# Altium PCB Control_Board_Model_C_Rigid_Flex.PcbDoc (part 4 of 8)
Units mm, origin at the board's own origin, x right, y up, seen from the top; angles counter-clockwise.
Board outline 86.8 x 53.6 mm, 6 copper layers (1-GND, 2-Sig, 3-Pwr, 4-GND, 5-Sig, 6-GND), stack 0.998 mm thick; 418 components, 342 nets, 1601 pads, 45 vias.
Unrouted connection lines stored in the file: 25.
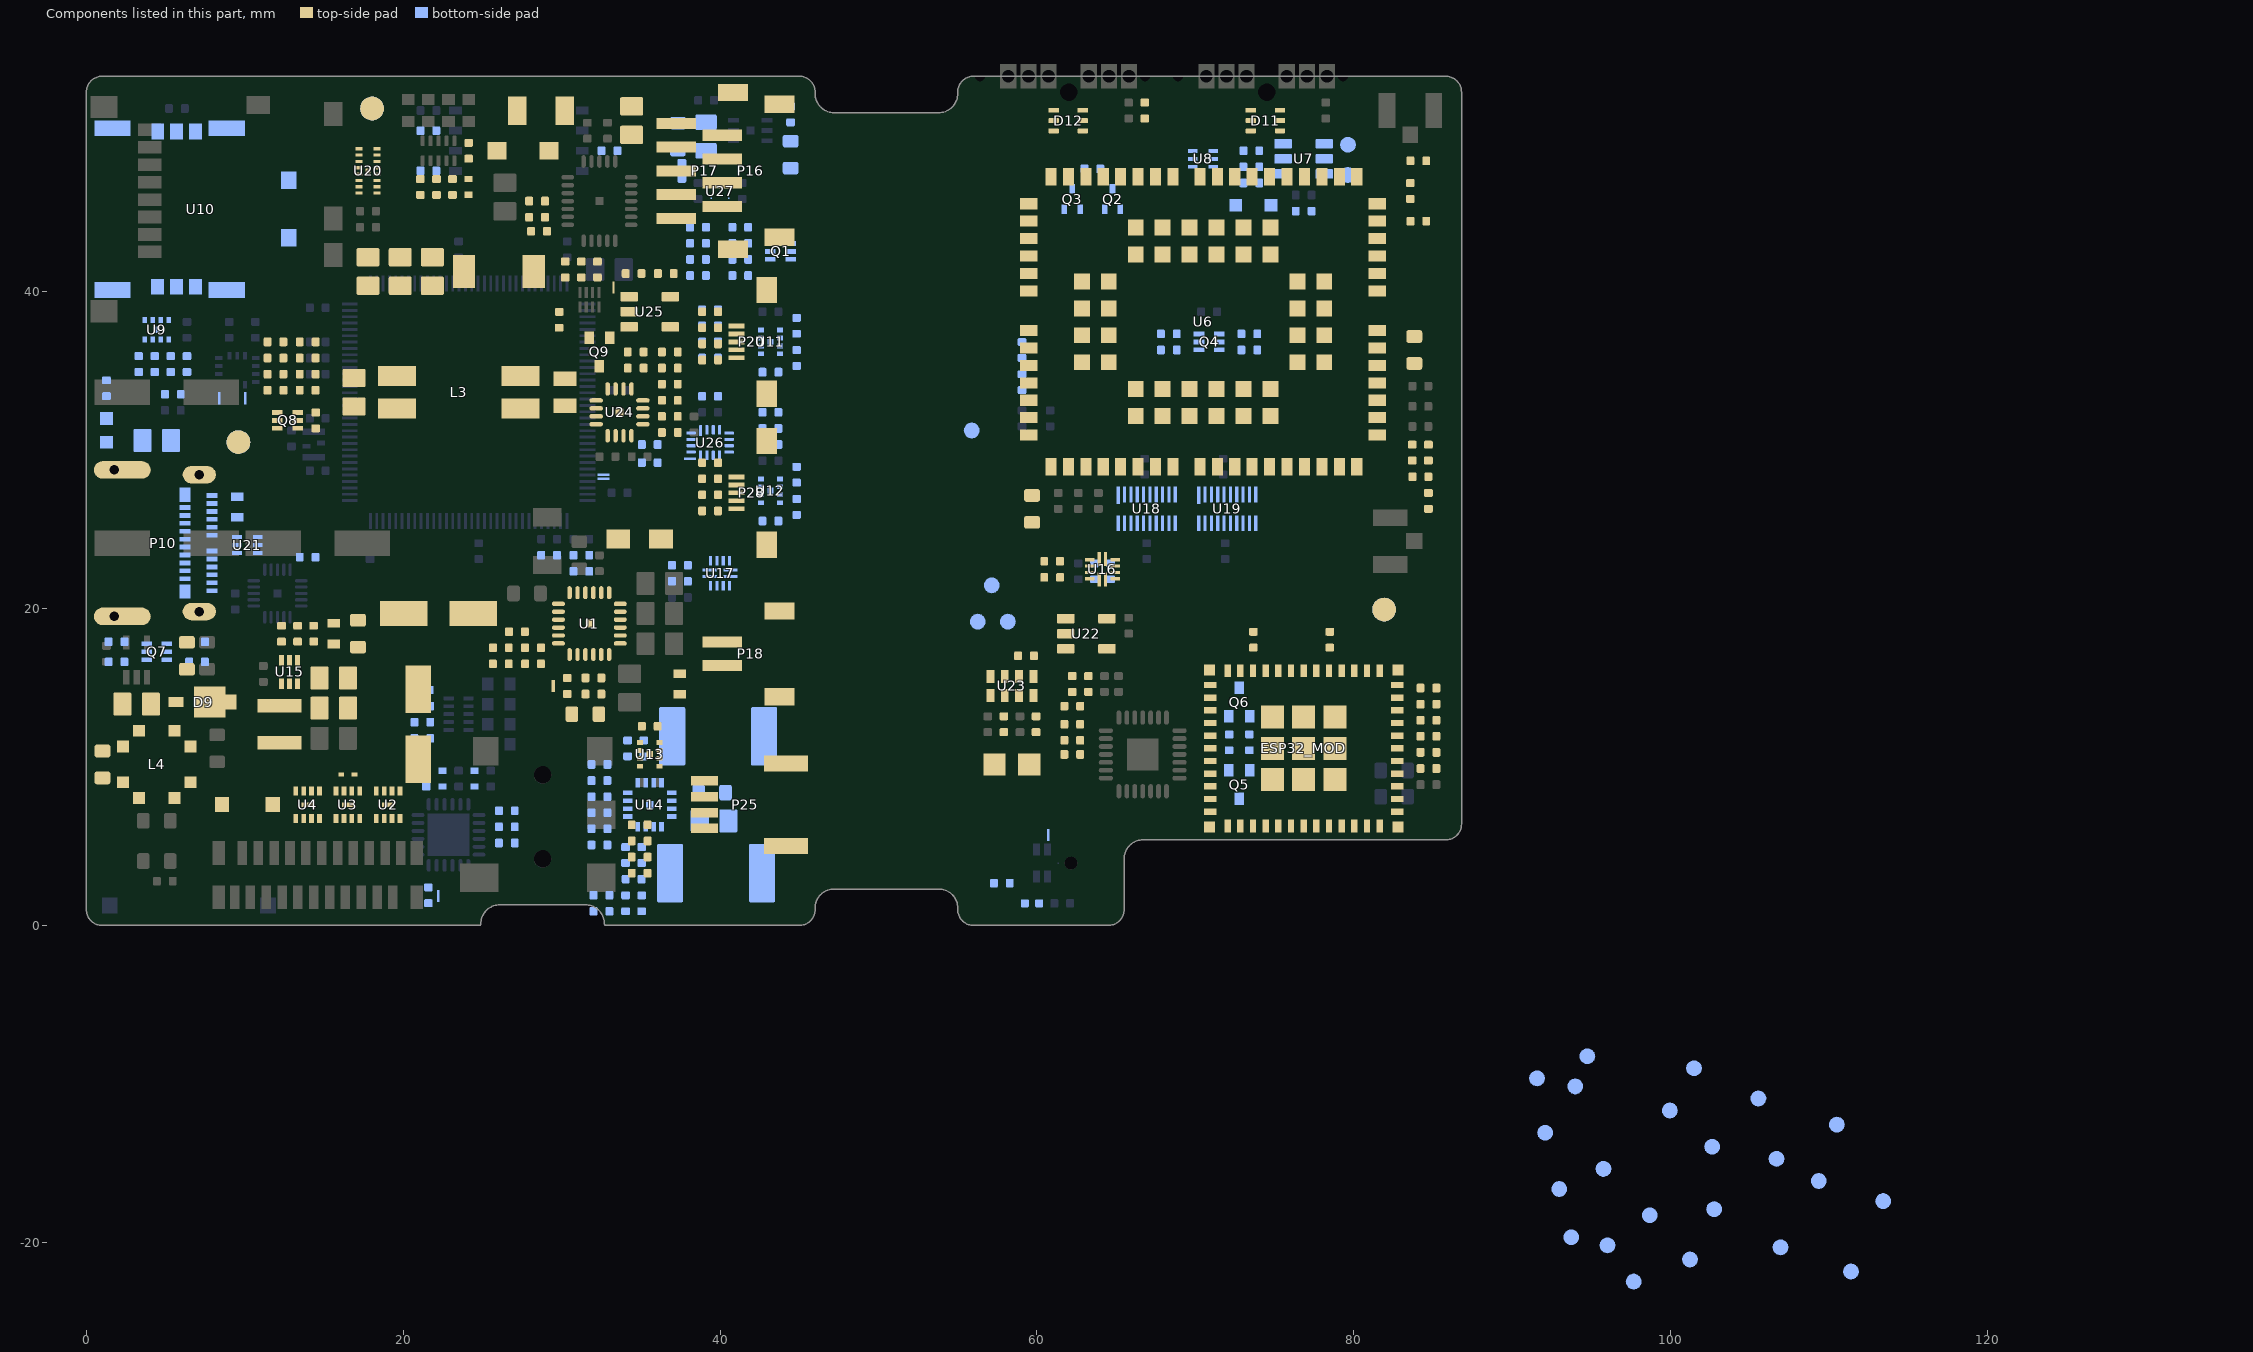
[diagram p7: the components of this part, seen from the top]

## Part data (continued)
C25 C26: "100µF 6.3V Aluminum Electrolytic Capacitors Radial, Can - SMD  2000 Hrs @ 105°C", Capacitance=100uF, Capacitance Tolerance=+/-20%, Case/Package=Radial, Leakage Current=6.3uA, Manufacturer="Wurth Elektronik", Manufacturer Part Number=865080142007, Max Operating Temperature=105°C, Min Operating Temperature=-55°C, Operating Temperature="-55 to +105degC", Package Quantity=1000, Ripple Current=170mA, Supplier Part Number 1=732-8472-1-ND, Tolerance=20%, Voltage Rating=6.3V, ClassName=P109, ComponentLink1Description=Manufacturer, ComponentLink1URL=http://www.we-online.de, ComponentLink2Description=Datasheet, ComponentLink2URL=https://www.we-online.com/catalog/datasheet/865080142007.pdf, ComponentLink3Description=http://www.farnell.com/datasheets/1880090.pdf?src-supplier=Farnell, ComponentLink3URL=http://www.farnell.com/datasheets/1880090.pdf?src-supplier=Farnell, ComponentLink4Description=http://www.farnell.com/datasheets/1880090.pdf?src-supplier=Newark, ComponentLink4URL=http://www.farnell.com/datasheets/1880090.pdf?src-supplier=Newark, ComponentLink5Description=http://katalog.we-online.de/pbs/datasheet/865080142007.pdf?src-supplier=Digi-Key, ComponentLink5URL=http://katalog.we-online.de/pbs/datasheet/865080142007.pdf?src-supplier=Digi-Key, ComponentLink6Description=http://www.farnell.com/datasheets/1880090.pdf?src-supplier=Element14, ComponentLink6URL=http://www.farnell.com/datasheets/1880090.pdf?src-supplier=Element14, ComponentLink7Description=https://katalog.we-online.de/pbs/datasheet/865080142007.pdf?src-supplier=Digi-Key, ComponentLink7URL=https://katalog.we-online.de/pbs/datasheet/865080142007.pdf?src-supplier=Digi-Key, Diameter=5mm, Dissipation Factor=24%, Endurance=2000h, Height=5.5mm, Height - Seated (Max)=0.217inch, Impedance=800mR, Life (Hours)=2000Hour, Mount="Surface Mount", Mounting Technology=SMT, Packaging="Tape and Reel", Polarity=Polar, Pricing 1="1=0.2, 50=0.167, 100=0.145, 250=0.129, 500=0.113 (USD)", Published Date="May 2020", REACH SVHC=Unknown, Ripple Current (AC)=170mA, Stock 1=2227, Supplier 1=Digi-Key, Technical Reference=ASEC055101M6R3DVCTBB000, Voltage Rating (DC)=6.3V
C27 C28 C29 C30 C40 C41 C42: library part "CAP CER NO_BOM 0402", "Placeholder for a 0402 capacitor"
  C27 C28 C29 C30: ClassName=P109
C31 C97: "100pF ±5% 50V Ceramic Capacitor C0G, NP0 0402 (1005 Metric)", Capacitance=100pF, Case/Package=0402, Case Code (Metric)=1005, Dielectric=C0G, Dielectric Material=Ceramic, Insulation Resistance=100GR, Manufacturer=Yageo, Manufacturer Part Number=CC0402JRNPO9BN101, Max Operating Temperature=125°C, Min Operating Temperature=-55°C, Package Quantity=1, Supplier Part Number 1=311-1024-1-ND, Temperature Coefficient=30ppm/°C, Tolerance=5%, Voltage=50V, Case Code (Imperial)=0402, ComponentLink1Description=http://www.farnell.com/datasheets/2213336.pdf?src-supplier=Newark, ComponentLink1URL=http://www.farnell.com/datasheets/2213336.pdf?src-supplier=Newark, ComponentLink2Description=http://www.yageo.com/documents/recent/UPY-GP_NP0_16V-to-50V_16.pdf?src-supplier=Digi-Key, ComponentLink2URL=http://www.yageo.com/documents/recent/UPY-GP_NP0_16V-to-50V_16.pdf?src-supplier=Digi-Key, ComponentLink3Description=http://documents.rs-components.com/techlib://itc_doclist_GB.htm?stockno=6698684&src-supplier=RSComponents, ComponentLink3URL=http://documents.rs-components.com/techlib://itc_doclist_GB.htm?stockno=6698684&src-supplier=RSComponents, ComponentLink4Description=http://www.yageo.com/documents/recent/UPY-GP_NP0_16V-to-50V_8.pdf?src-supplier=Avnet+Europe, ComponentLink4URL=http://www.yageo.com/documents/recent/UPY-GP_NP0_16V-to-50V_8.pdf?src-supplier=Avnet+Europe, ComponentLink5Description=http://www.farnell.com/datasheets/1443161.pdf?src-supplier=Element14, ComponentLink5URL=http://www.farnell.com/datasheets/1443161.pdf?src-supplier=Element14, ComponentLink6Description=http://www.farnell.com/datasheets/2213336.pdf?src-supplier=Element14, ComponentLink6URL=http://www.farnell.com/datasheets/2213336.pdf?src-supplier=Element14, Composition=Ceramic, Depth=0.5mm, Height=0.5mm, Lead Free="Lead Free", Length=1mm, Mount="Surface Mount", Number of Pins=2, Packaging="Tape and Reel", Pricing 1="1=0.1, 10=0.02, 100=0.0089, 500=0.0064, 1000=0.005, 2500=0.0046, 5000=0.0042 (USD)", Radiation Hardening=No, REACH SVHC="No SVHC", Stock 1=4235236, Supplier 1=Digi-Key, Termination=SMD/SMT, Thickness=0.022inch, Voltage Rating=50V, Voltage Rating (DC)=50V, Width=0.5mm
C32 C43 C95 C98: "Cap Cer 10nF 25V X7R 10% 0402", Capacitance=10nF, Case/Package=0402, Case Code (Metric)=1005, Dielectric=X7R, Insulation Resistance=100GR, Manufacturer="Kyocera AVX", Manufacturer Part Number=04023C103KAT2A, Max Operating Temperature=125°C, Min Operating Temperature=-55°C, Package Quantity=1, Supplier Part Number 1=478-1113-1-ND, Tolerance=10%, Voltage=25V, Case Code (Imperial)=0402, ComponentLink1Description=http://www.farnell.com/datasheets/2237835.pdf?src-supplier=Element14, ComponentLink1URL=http://www.farnell.com/datasheets/2237835.pdf?src-supplier=Element14, ComponentLink2Description=http://catalogs.avx.com/SurfaceMount.pdf?src-supplier=Digi-Key, ComponentLink2URL=http://catalogs.avx.com/SurfaceMount.pdf?src-supplier=Digi-Key, ComponentLink3Description=http://www.alliedelec.com/m/d/a24bb5190bea413b2ff164816f55e87c.pdf?src-supplier=Allied+Electronics, ComponentLink3URL=http://www.alliedelec.com/m/d/a24bb5190bea413b2ff164816f55e87c.pdf?src-supplier=Allied+Electronics, ComponentLink4Description=http://uk.rs-online.com/webdocs/13ec/0900766b813ece35.pdf?src-supplier=RSComponents, ComponentLink4URL=http://uk.rs-online.com/webdocs/13ec/0900766b813ece35.pdf?src-supplier=RSComponents, Depth=0.5mm, Dissipation Factor=12.5%, Height=0.56mm, Lead Free="Lead Free", Length=1mm, Packaging="Tape and Reel", Pricing 1="1=0.1, 10=0.034, 50=0.0182, 100=0.0149, 500=0.0107, 1000=0.0084, 2500=0.0076, 5000=0.007 (USD)", Radiation Hardening=No, REACH SVHC="No SVHC", Stock 1=1015537, Supplier 1=Digi-Key, Termination=SMD/SMT, Thickness=0.022inch, Voltage Rating=25V, Voltage Rating (DC)=25V, Width=0.02inch
  C32: ClassName=P109, Mount="Surface Mount"
  C43: Mount="Surface Mount"
  C95 C98: Mount="Surface Mount,PCB"
C37 C38 C39 C45 C86 C87: "1µF ±10% 6.3V Ceramic Capacitor X5R 0402 (1005 Metric)", Capacitance=1uF, Case/Package=0402, Case Code (Metric)=1005, Dielectric=X5R, Dielectric Material=Ceramic, Manufacturer=Yageo, Manufacturer Part Number=CC0402KRX5R5BB105, Max Operating Temperature=85°C, Min Operating Temperature=-55°C, Package Quantity=1, Supplier Part Number 1=311-1438-1-ND, Tolerance=10%, Voltage Rating=6.3V, Case Code (Imperial)=0402, ComponentLink1Description=http://www.farnell.com/datasheets/70765.pdf?src-supplier=Farnell, ComponentLink1URL=http://www.farnell.com/datasheets/70765.pdf?src-supplier=Farnell, ComponentLink2Description=http://www.yageo.com/documents/recent/UPY-GPHC_X5R_4V-to-50V_25.pdf?src-supplier=Digi-Key, ComponentLink2URL=http://www.yageo.com/documents/recent/UPY-GPHC_X5R_4V-to-50V_25.pdf?src-supplier=Digi-Key, ComponentLink3Description=http://www.farnell.com/datasheets/2167237.pdf?src-supplier=Element14, ComponentLink3URL=http://www.farnell.com/datasheets/2167237.pdf?src-supplier=Element14, ComponentLink4Description=http://www.yageo.com/documents/recent/UPY-GPHC_X5R_4V-to-50V_12.pdf?src-supplier=Avnet+Europe, ComponentLink4URL=http://www.yageo.com/documents/recent/UPY-GPHC_X5R_4V-to-50V_12.pdf?src-supplier=Avnet+Europe, ComponentLink5Description=http://www.farnell.com/datasheets/1359354.pdf?src-supplier=Element14, ComponentLink5URL=http://www.farnell.com/datasheets/1359354.pdf?src-supplier=Element14, ComponentLink6Description=http://www.farnell.com/datasheets/70765.pdf?src-supplier=Element14, ComponentLink6URL=http://www.farnell.com/datasheets/70765.pdf?src-supplier=Element14, ComponentLink7Description=http://www.yageo.com/documents/recent/UPY-GPHC_X5R_4V-to-50V_12.pdf?src-supplier=Avnet, ComponentLink7URL=http://www.yageo.com/documents/recent/UPY-GPHC_X5R_4V-to-50V_12.pdf?src-supplier=Avnet, Composition=Ceramic, Depth=0.5mm, Halogen Free="Halogen Free", Height=0.5mm, Lead Free="Lead Free", Length=1mm, Mount="Surface Mount", Number of Pins=2, Packaging="Tape and Reel", Pricing 1="1=0.1, 10=0.05, 50=0.0272, 100=0.0222, 500=0.0158, 1000=0.0124, 2500=0.0113, 5000=0.0104 (USD)", Radiation Hardening=No, REACH SVHC="No SVHC", Stock 1=34926286, Supplier 1=Digi-Key, Termination=SMD/SMT, Thickness=0.022inch, Voltage Rating (DC)=6.3V, Width=0.02inch
C44: "1000pF ±10% 50V Ceramic Capacitor X7R 0402 (1005 Metric)", Capacitance=1nF, Case/Package=0402, Dielectric=X7R, Dielectric Material=Ceramic, Manufacturer=TDK-Lambda, Manufacturer Part Number=C0402C102K5RACTU, Supplier Part Number 1=399-1032-6-ND, Tolerance=10%, Voltage Rating (DC)=50V, ComponentLink1Description=http://www.onlinecomponents.com/productFiles/mf-KEM/kem_c1002_x7r_smd.pdf?src-supplier=Onlinecomponents.com, ComponentLink1URL=http://www.onlinecomponents.com/productFiles/mf-KEM/kem_c1002_x7r_smd.pdf?src-supplier=Onlinecomponents.com, Height=500um, Length=1mm, Mount="Surface Mount", Number of Pins=2, Packaging="Cut Tape", Pricing 1="1=0.1, 10=0.021, 50=0.0116, 100=0.0095, 500=0.0068, 1000=0.0053, 2500=0.0048, 5000=0.0045 (USD)", REACH SVHC="No SVHC", Stock 1=1578852, Supplier 1=Digi-Key, Width=500um
C46: "0.022µF ±10% 25V Ceramic Capacitor X7R 0402 (1005 Metric)", Capacitance=22nF, Case/Package=0402, Case Code (Metric)=1005, Dielectric=X7R, Manufacturer=TDK, Manufacturer Part Number=CGA2B2X7R1E223K050BA, Max Operating Temperature=125°C, Min Operating Temperature=-55°C, Package Quantity=1, Ratings=AEC-Q200, Supplier Part Number 1=445-5609-1-ND, Tolerance=10%, Voltage Rating=25V, Case Code (Imperial)=0402, ComponentLink1Description=http://www.mouser.com/ds/2/400/lcc_automotive_general_en-843974.pdf?src-supplier=Mouser, ComponentLink1URL=http://www.mouser.com/ds/2/400/lcc_automotive_general_en-843974.pdf?src-supplier=Mouser, Composition=Ceramic, Depth=0.5mm, Height=0.5mm, Length=1mm, Mount="Surface Mount", Packaging="Tape and Reel", Pricing 1="1=0.1, 10=0.057, 50=0.0312, 100=0.0255, 500=0.0182, 1000=0.0143, 2500=0.013, 5000=0.012 (USD)", REACH SVHC="No SVHC", Stock 1=330320, Supplier 1=Digi-Key, Termination=SMD/SMT, Thickness=0.022inch, Voltage Rating (DC)=25V, Weight=2.3E-05oz, Width=0.5mm
C47 C73 C77 C78 C79 C80 C89: "22µF ±20% 25V Ceramic Capacitor X5R 0805 (2012 Metric)", Capacitance=22uF, Case/Package=0805, Case Code (Metric)=2012, Dielectric=X5R, Manufacturer=Yageo, Manufacturer Part Number=CC0805MKX5R8BB226, Max Operating Temperature=85°C, Min Operating Temperature=-55°C, Package Quantity=3000, Supplier Part Number 1=311-1903-1-ND, Tolerance=20%, Voltage Rating=25V, Case Code (Imperial)=0805, ComponentLink1Description=http://www.yageo.com/documents/recent/UPY-GPHC_X5R_4V-to-50V_25.pdf?src-supplier=Digi-Key, ComponentLink1URL=http://www.yageo.com/documents/recent/UPY-GPHC_X5R_4V-to-50V_25.pdf?src-supplier=Digi-Key, ComponentLink2Description=http://www.mouser.com/ds/2/447/Yageo_UPY-GP_NP0_16V-to-50V_9-358835.pdf?src-supplier=Mouser, ComponentLink2URL=http://www.mouser.com/ds/2/447/Yageo_UPY-GP_NP0_16V-to-50V_9-358835.pdf?src-supplier=Mouser, Halogen Free="Halogen Free", Height=1.25mm, Lead Free="Lead Free", Length=0.079inch, Mount="Surface Mount", Packaging="Tape and Reel", Pricing 1="1=0.5, 10=0.353, 50=0.267, 100=0.2325, 500=0.1722, 1000=0.1464 (USD)", Stock 1=1060, Supplier 1=Digi-Key, Termination=SMD/SMT, Thickness=0.057inch, Voltage Rating (DC)=25V, Weight=0.000194oz, Width=0.049inch
C48: "2.2µF ±10% 16V Ceramic Capacitor X5R 0603 (1608 Metric)", Capacitance=2.2uF, Case/Package=0603, Case Code (Metric)=1608, Dielectric=X5R, Manufacturer=Yageo, Manufacturer Part Number=CC0603KRX5R7BB225, Max Operating Temperature=85°C, Min Operating Temperature=-55°C, Supplier Part Number 1=311-1784-1-ND, Tolerance=10%, Voltage Rating=16V, Case Code (Imperial)=0603, ComponentLink1Description=http://www.farnell.com/datasheets/2167237.pdf?src-supplier=Element14, ComponentLink1URL=http://www.farnell.com/datasheets/2167237.pdf?src-supplier=Element14, Composition=Ceramic, Depth=0.8mm, Halogen Free="Halogen Free", Height=0.8mm, Lead Free="Lead Free", Length=1.6mm, Mount="Surface Mount", Packaging="Tape and Reel", Pricing 1="1=0.19, 10=0.132, 100=0.0667, 500=0.0456, 1000=0.0404 (USD)", Radiation Hardening=No, REACH SVHC=Unknown, Stock 1=126369, Supplier 1=Digi-Key, Termination=SMD/SMT, Thickness=0.035inch, Voltage Rating (DC)=16V, Width=0.031inch
C51 C52: "22µF ±20% 10V Ceramic Capacitor X5R 0805 (2012 Metric)", Capacitance=22uF, Case/Package=0805, Case Code (Metric)=2012, Dielectric=X5R, Manufacturer="Taiyo Yuden", Manufacturer Part Number=LMK212BJ226MG-T, Max Operating Temperature=85°C, Min Operating Temperature=-55°C, Package Quantity=1, Supplier Part Number 1=587-1958-1-ND, Tolerance=20%, Voltage Rating=10V, Case Code (Imperial)=0805, ComponentLink1Description=https://www.yuden.co.jp/productdata/catalog/mlcc_all_e.pdf?src-supplier=Onlinecomponents.com, ComponentLink1URL=https://www.yuden.co.jp/productdata/catalog/mlcc_all_e.pdf?src-supplier=Onlinecomponents.com, ComponentLink2Description=https://www.yuden.co.jp/productdata/catalog/mlcc01_e.pdf?src-supplier=Digi-Key, ComponentLink2URL=https://www.yuden.co.jp/productdata/catalog/mlcc01_e.pdf?src-supplier=Digi-Key, ComponentLink3Description=https://www.yuden.co.jp/productdata/catalog/mlcc_all_e.pdf?src-supplier=Mouser, ComponentLink3URL=https://www.yuden.co.jp/productdata/catalog/mlcc_all_e.pdf?src-supplier=Mouser, ComponentLink4Description=http://www.farnell.com/datasheets/1910934.pdf?src-supplier=Element14, ComponentLink4URL=http://www.farnell.com/datasheets/1910934.pdf?src-supplier=Element14, ComponentLink5Description=https://www.yuden.co.jp/productdata/catalog/mlcc_all_e.pdf?src-supplier=Avnet, ComponentLink5URL=https://www.yuden.co.jp/productdata/catalog/mlcc_all_e.pdf?src-supplier=Avnet, Composition=Ceramic, Depth=1.25mm, Height=1.25mm, Length=2mm, Mount="Surface Mount", Number of Pins=2, Packaging="Tape and Reel", Pricing 1="1=0.45, 10=0.312, 100=0.1875, 500=0.1406, 1000=0.1187 (USD)", Radiation Hardening=No, REACH SVHC=Unknown, Stock 1=1006805, Supplier 1=Digi-Key, Termination=SMD/SMT, Thickness=0.053inch, Voltage Rating (DC)=10V, Width=0.049inch
C61 C63: "220pF ±10% 50V Ceramic Capacitor X7R 0402 (1005 Metric)", Capacitance=220pF, Case/Package=0402, Case Code (Metric)=1005, Dielectric=X7R, Dielectric Material=Ceramic, Insulation Resistance=100GR, Manufacturer=Yageo, Manufacturer Part Number=CC0402KRX7R9BB221, Max Operating Temperature=125°C, Min Operating Temperature=-55°C, Package Quantity=1, Supplier Part Number 1=311-1035-1-ND, Tolerance=10%, Voltage Rating=50V, Case Code (Imperial)=0402, ClassName=TCPP, ComponentLink1Description=http://www.yageo.com/documents/recent/UPY-GPHC_X7R_6.3V-to-50V_18.pdf?src-supplier=Digi-Key, ComponentLink1URL=http://www.yageo.com/documents/recent/UPY-GPHC_X7R_6.3V-to-50V_18.pdf?src-supplier=Digi-Key, ComponentLink2Description=http://www.farnell.com/datasheets/2167236.pdf?src-supplier=Farnell, ComponentLink2URL=http://www.farnell.com/datasheets/2167236.pdf?src-supplier=Farnell, ComponentLink3Description=http://www.yageo.com/documents/recent/UPY-GPHC_X7R_6.3V-to-50V_8.pdf?src-supplier=Avnet, ComponentLink3URL=http://www.yageo.com/documents/recent/UPY-GPHC_X7R_6.3V-to-50V_8.pdf?src-supplier=Avnet, ComponentLink4Description=http://www.farnell.com/datasheets/1489800.pdf?src-supplier=Element14, ComponentLink4URL=http://www.farnell.com/datasheets/1489800.pdf?src-supplier=Element14, ComponentLink5Description=http://www.mouser.com/ds/2/447/Yageo_UPY-GP_NP0_16V-to-50V_9-358835.pdf?src-supplier=Mouser, ComponentLink5URL=http://www.mouser.com/ds/2/447/Yageo_UPY-GP_NP0_16V-to-50V_9-358835.pdf?src-supplier=Mouser, ComponentLink6Description=https://www.verical.com/server-webapp/html/getDatasheet?partID=403476&src-supplier=Verical, ComponentLink6URL=https://www.verical.com/server-webapp/html/getDatasheet?partID=403476&src-supplier=Verical, ComponentLink7Description=http://www.yageo.com/documents/recent/UPY-GPHC_X7R_6.3V-to-50V_8.pdf?src-supplier=Avnet+Europe, ComponentLink7URL=http://www.yageo.com/documents/recent/UPY-GPHC_X7R_6.3V-to-50V_8.pdf?src-supplier=Avnet+Europe, Composition=Ceramic, Depth=0.5mm, Halogen Free="Halogen Free", Height=0.5mm, Lead Free="Lead Free", Length=1mm, Mount="Surface Mount", Number of Pins=2, Packaging="Tape and Reel", Pricing 1="1=0.1, 10=0.026, 50=0.014, 100=0.0114, 500=0.0081, 1000=0.0064, 2500=0.0058, 5000=0.0053 (USD)", Radiation Hardening=No, REACH SVHC="No SVHC", Stock 1=91221, Supplier 1=Digi-Key, Termination=SMD/SMT, Thickness=0.022inch, Voltage Rating (DC)=50V, Weight=2.3E-05oz, Width=0.02inch
C62: Capacitance=4.7uF, Case/Package=0805, Case Code (Metric)=2012, Dielectric=X7R, Dielectric Material=Ceramic, Manufacturer=TDK, Manufacturer Part Number=C2012X7R1V475K125AC, Max Operating Temperature=125°C, Min Operating Temperature=-55°C, Package Quantity=2000, Supplier Part Number 1=445-7555-1-ND, Tolerance=10%, Voltage Rating=35V, Case Code (Imperial)=0805, ComponentLink1Description=http://www.farnell.com/datasheets/2792994.pdf?src-supplier=Element14, ComponentLink1URL=http://www.farnell.com/datasheets/2792994.pdf?src-supplier=Element14, ComponentLink2Description=https://product.tdk.com/info/en/catalog/datasheets/mlcc_commercial_general_en.pdf?src-supplier=Digi-Key, ComponentLink2URL=https://product.tdk.com/info/en/catalog/datasheets/mlcc_commercial_general_en.pdf?src-supplier=Digi-Key, ComponentLink3Description=https://product.tdk.com/info/en/catalog/spec/mlccspec_commercial_general_midvoltage_en.pdf?src-supplier=Digi-Key, ComponentLink3URL=https://product.tdk.com/info/en/catalog/spec/mlccspec_commercial_general_midvoltage_en.pdf?src-supplier=Digi-Key, Depth=1.25mm, Height=1.25mm, Lead Free="Lead Free", Length=2mm, Mount="Surface Mount", Packaging="Tape and Reel", Pricing 1="1=0.73, 10=0.519, 50=0.3752, 100=0.3416, 500=0.253, 1000=0.2151 (USD)", Radiation Hardening=No, REACH SVHC="No SVHC", Stock 1=109602, Supplier 1=Digi-Key, Termination=SMD/SMT, Thickness=0.057inch, Voltage Rating (DC)=35V, Weight=0.000194oz, Width=0.049inch
C70: "11mF (EDLC) Supercapacitor 3.3V 1210 (3225 Metric)", Capacitance=11mF, Case/Package=1210, Case Code (Metric)=3225, ESR (Equivalent Series Resistance)=160R, Manufacturer=Seiko, Manufacturer Part Number=CPH3225A, Max Operating Temperature=60°C, Min Operating Temperature=-20°C, Package Quantity=2000, Supplier Part Number 1=728-1127-1-ND, Voltage Rating=3.3V, Case Code (Imperial)=1210, ComponentLink1Description=http://www.sii.co.jp/en/me/datasheets/chip-capacitor/cph3225a/?src-supplier=Mouser, ComponentLink1URL=http://www.sii.co.jp/en/me/datasheets/chip-capacitor/cph3225a/?src-supplier=Mouser, ComponentLink2Description=http://www.sii-components.com/document/en/battery/Chip_Capacitor_E.pdf?src-supplier=Avnet+Asia, ComponentLink2URL=http://www.sii-components.com/document/en/battery/Chip_Capacitor_E.pdf?src-supplier=Avnet+Asia, ComponentLink3Description=https://media.digikey.com/pdf/Data%20Sheets/Seiko%20Instruments%20PDFs/CPH3225A_CP3225A.pdf?src-supplier=Digi-Key, ComponentLink3URL=https://media.digikey.com/pdf/Data%20Sheets/Seiko%20Instruments%20PDFs/CPH3225A_CP3225A.pdf?src-supplier=Digi-Key, Height=0.9mm, Height - Seated (Max)=0.035inch, Length=3.2mm, Mount="Surface Mount", Packaging="Tape and Reel", Pricing 1="1=2.02, 10=1.634, 50=1.4256, 100=1.2474, 500=0.9504, 1000=0.8316, 2500=0.8019, 5000=0.7722 (USD)", Stock 1=48098, Supplier 1=Digi-Key, Termination=SMD/SMT, Voltage Rating (DC)=3.3V, Width=2.5mm
C75: "1800pF ±5% 50V Ceramic Capacitor X7R 0402 (1005 Metric)", Capacitance=1.8nF, Case/Package=0402, Case Code (Metric)=1005, Dielectric=X7R, Dielectric Material=Ceramic, Manufacturer=KEMET, Manufacturer Part Number=C0402C182J5RACTU, Max Operating Temperature=125°C, Min Operating Temperature=-55°C, Package Quantity=1, Supplier Part Number 1=399-8953-1-ND, Tolerance=5%, Voltage Rating=50V, Case Code (Imperial)=0402, ComponentLink1Description=http://www.mouser.com/ds/2/212/KEM_C1002_X7R_SMD-1102033.pdf?src-supplier=Mouser, ComponentLink1URL=http://www.mouser.com/ds/2/212/KEM_C1002_X7R_SMD-1102033.pdf?src-supplier=Mouser, Depth=0.5mm, Dissipation Factor=2.5%, Height=0.5mm, Lead Pitch=0.3mm, Length=1mm, Mount="Surface Mount", Packaging="Tape and Reel", Pricing 1="1=0.46, 10=0.322, 50=0.2438, 100=0.2124, 500=0.1573, 1000=0.1337, 2500=0.1258, 5000=0.118 (USD)", Radiation Hardening=No, REACH SVHC="No SVHC", Stock 1=45958, Supplier 1=Digi-Key, Termination=SMD/SMT, Thickness=0.022inch, Voltage Rating (DC)=50V, Width=0.02inch
C76 C81 C100 C117 C119 C129 C131 C132 C147: "1µF ±10% 16V Ceramic Capacitor X5R 0402 (1005 Metric)", Capacitance=1uF, Case/Package=0402, Case Code (Metric)=1005, Dielectric=X5R, Manufacturer=Yageo, Manufacturer Part Number=CC0402KRX5R7BB105, Max Operating Temperature=85°C, Min Operating Temperature=-55°C, Supplier Part Number 1=311-1691-1-ND, Tolerance=10%, Voltage Rating=16V, Case Code (Imperial)=0402, ComponentLink1Description=http://www.yageo.com/documents/recent/UPY-GPHC_X5R_4V-to-50V_12.pdf?src-supplier=Avnet+Europe, ComponentLink1URL=http://www.yageo.com/documents/recent/UPY-GPHC_X5R_4V-to-50V_12.pdf?src-supplier=Avnet+Europe, Composition=Ceramic, Depth=0.5mm, Halogen Free="Halogen Free", Height=0.5mm, Lead Free="Lead Free", Length=1mm, Mount="Surface Mount", Packaging="Tape and Reel", Pricing 1="1=0.4, 10=0.278, 100=0.167, 500=0.1253, 1000=0.1058, 2500=0.1002, 5000=0.0947 (USD)", Radiation Hardening=No, Stock 1=1114963, Supplier 1=Digi-Key, Termination=SMD/SMT, Thickness=0.022inch, Voltage Rating (DC)=16V, Weight=2.3E-05oz, Width=0.02inch
C91 C92: library part "CAP CER 0.1UF 50V X7R 0402", "0.1µF ±10% 50V Ceramic Capacitor X7R 0402 (1005 Metric)", Capacitance=100nF, Case/Package=0402, Case Code (Metric)=1005, Dielectric=X7R, Manufacturer=TDK, Max Operating Temperature=125°C, Min Operating Temperature=-55°C, Package Quantity=1, Ratings=AEC-Q200, Supplier Part Number 1=445-6899-1-ND, Tolerance=10%, Voltage=50V, Case Code (Imperial)=0402, ComponentLink1Description=http://product.tdk.com/capacitor/mlcc/en/documents/mlccspec_automotive_general_midvoltage_en.pdf?src-supplier=Future+Electronics, ComponentLink1URL=http://product.tdk.com/capacitor/mlcc/en/documents/mlccspec_automotive_general_midvoltage_en.pdf?src-supplier=Future+Electronics, ComponentLink2Description=http://www.farnell.com/datasheets/1807242.pdf?src-supplier=Element14, ComponentLink2URL=http://www.farnell.com/datasheets/1807242.pdf?src-supplier=Element14, ComponentLink3Description=http://www.mouser.com/ds/2/400/lcc_automotive_general_en-843974.pdf?src-supplier=Mouser, ComponentLink3URL=http://www.mouser.com/ds/2/400/lcc_automotive_general_en-843974.pdf?src-supplier=Mouser, ComponentLink4Description=http://www.farnell.com/datasheets/1936565.pdf?src-supplier=Element14, ComponentLink4URL=http://www.farnell.com/datasheets/1936565.pdf?src-supplier=Element14, ComponentLink5Description=http://www.farnell.com/datasheets/1735392.pdf?src-supplier=Element14, ComponentLink5URL=http://www.farnell.com/datasheets/1735392.pdf?src-supplier=Element14, Composition=Ceramic, Depth=0.5mm, Height=0.5mm, Lead Free="Lead Free", Length=1mm, Manufacturer Part Number=CGA2B3X7R1H104K050BB, Mount="Surface Mount", Packaging="Tape and Reel", Pricing 1="1=0.17, 10=0.118, 50=0.0668, 100=0.0553, 500=0.0388, 1000=0.0321, 2500=0.0299, 5000=0.0273 (USD)", REACH SVHC="No SVHC", Stock 1=2925303, Supplier 1=Digi-Key, Termination=SMD/SMT, Thickness=0.022inch, Voltage Rating=50V, Voltage Rating (DC)=50V, Weight=2.3E-05oz, Width=0.02inch
C121 C123: "2.2µF ±10% 35V Ceramic Capacitor X5R 0603 (1608 Metric)", Capacitance=2.2uF, Case/Package=0603, Case Code (Metric)=1608, Dielectric=X5R, Manufacturer=Murata, Manufacturer Part Number=GRM188R6YA225KA12D, Max Operating Temperature=85°C, Min Operating Temperature=-55°C, Package Quantity=4000, Supplier Part Number 1=490-7204-1-ND, Tolerance=10%, Voltage=35V, Case Code (Imperial)=0603, ComponentLink1Description=https://www.murata.com/~/media/webrenewal/support/library/catalog/products/capacitor/mlcc/c02e.ashx?la=en-us&src-supplier=Digi-Key, ComponentLink1URL=https://www.murata.com/~/media/webrenewal/support/library/catalog/products/capacitor/mlcc/c02e.ashx?la=en-us&src-supplier=Digi-Key, Depth=0.8mm, Height=0.8mm, Lead Free="Lead Free", Length=1.6mm, Material=Ceramic, Mount="Surface Mount", Packaging="Tape and Reel", Pricing 1="1=0.21, 10=0.141, 100=0.0717, 500=0.049, 1000=0.0434 (USD)", REACH SVHC="No SVHC", Stock 1=323373, Supplier 1=Digi-Key, Termination=SMD/SMT, Thickness=0.035inch, Voltage Rating=35V, Voltage Rating (DC)=35V, Weight=0.000222oz, Width=0.8mm
C126 C142: "100pF ±5% 50V Ceramic Capacitor C0G, NP0 0402 (1005 Metric)", Capacitance=100pF, Case/Package=0402, Case Code (Metric)=1005, Dielectric=C0G, Dielectric Material=Ceramic, Insulation Resistance=100GR, Manufacturer=Yageo, Manufacturer Part Number=CC0402JRNPO9BN101, Max Operating Temperature=125°C, Min Operating Temperature=-55°C, Package Quantity=1, Supplier Part Number 1=311-1024-6-ND, Temperature Coefficient=30ppm/°C, Tolerance=5%, Voltage=50V, Case Code (Imperial)=0402, ComponentLink1Description=http://www.farnell.com/datasheets/2213336.pdf?src-supplier=Newark, ComponentLink1URL=http://www.farnell.com/datasheets/2213336.pdf?src-supplier=Newark, ComponentLink2Description=http://www.yageo.com/documents/recent/UPY-GP_NP0_16V-to-50V_16.pdf?src-supplier=Digi-Key, ComponentLink2URL=http://www.yageo.com/documents/recent/UPY-GP_NP0_16V-to-50V_16.pdf?src-supplier=Digi-Key, ComponentLink3Description=http://documents.rs-components.com/techlib://itc_doclist_GB.htm?stockno=6698684&src-supplier=RSComponents, ComponentLink3URL=http://documents.rs-components.com/techlib://itc_doclist_GB.htm?stockno=6698684&src-supplier=RSComponents, ComponentLink4Description=http://www.yageo.com/documents/recent/UPY-GP_NP0_16V-to-50V_8.pdf?src-supplier=Avnet+Europe, ComponentLink4URL=http://www.yageo.com/documents/recent/UPY-GP_NP0_16V-to-50V_8.pdf?src-supplier=Avnet+Europe, ComponentLink5Description=http://www.farnell.com/datasheets/1443161.pdf?src-supplier=Element14, ComponentLink5URL=http://www.farnell.com/datasheets/1443161.pdf?src-supplier=Element14, ComponentLink6Description=http://www.farnell.com/datasheets/2213336.pdf?src-supplier=Element14, ComponentLink6URL=http://www.farnell.com/datasheets/2213336.pdf?src-supplier=Element14, Composition=Ceramic, Depth=0.5mm, Height=0.5mm, Lead Free="Lead Free", Length=1mm, Mount="Surface Mount", Number of Pins=2, Packaging="Tape and Reel", Pricing 1="1=0.1, 10=0.02, 100=0.0089, 500=0.0064, 1000=0.005, 2500=0.0046, 5000=0.0042 (USD)", Radiation Hardening=No, REACH SVHC="No SVHC", Stock 1=3017640, Supplier 1=Digi-Key, Termination=SMD/SMT, Thickness=0.022inch, Voltage Rating=50V, Voltage Rating (DC)=50V, Width=0.5mm
C136: "10µF ±10% 16V Ceramic Capacitor X7R 0805 (2012 Metric)", Capacitance=10uF, Case/Package=0805, Case Code (Metric)=2012, Dielectric=X7R, Manufacturer=Samsung, Manufacturer Part Number=CL21B106KOQNNNG, Max Operating Temperature=125°C, Min Operating Temperature=-55°C, Package Quantity=3000, Supplier Part Number 1=1276-6472-1-ND, Tolerance=10%, Voltage Rating=16V, Case Code (Imperial)=0805, ComponentLink1Description=http://www.samsungsem.com/kr/support/product-search/mlcc/CL21B106KOQNNNG.jsp?src-supplier=Digi-Key, ComponentLink1URL=http://www.samsungsem.com/kr/support/product-search/mlcc/CL21B106KOQNNNG.jsp?src-supplier=Digi-Key, ComponentLink2Description=https://produktinfo.conrad.com/datenblaetter/450000-474999/454918-da-01-en-VS_KONDENSATOR_0805.pdf?src-supplier=Conrad, ComponentLink2URL=https://produktinfo.conrad.com/datenblaetter/450000-474999/454918-da-01-en-VS_KONDENSATOR_0805.pdf?src-supplier=Conrad, Depth=1.25mm, Lead Free="Lead Free", Length=0.079inch, Material=Ceramic, Mount="Surface Mount", Packaging="Tape and Reel", Pricing 1="1=0.3, 10=0.207, 100=0.1173, 500=0.0828, 1000=0.0725 (USD)", Stock 1=251380, Supplier 1=Digi-Key, Thickness=0.055inch, Width=0.049inch
D1: library part "LED RED CLEAR 0603 SMD", "Red 631nm LED Indication - Discrete 2V 0603 (1608 Metric)", Case/Package=0603, Case Code (Metric)=1608, Color=Red, Forward Current=30mA, Forward Voltage=2V, Lens Color=Colorless, Manufacturer="Vishay Lite-On", Manufacturer Part Number=LTST-C191KRKT, Max Operating Temperature=85°C, Min Operating Temperature=-55°C, Package Quantity=1, Power Dissipation=75mW, Reverse Voltage=5V, Supplier Part Number 1=160-1447-1-ND, Test Current=20mA, Case Code (Imperial)=0603, ComponentLink1Description=http://optoelectronics.liteon.com/upload/download/DS22-2000-223/LTST-C191KRKT.PDF?src-supplier=Digi-Key, ComponentLink1URL=http://optoelectronics.liteon.com/upload/download/DS22-2000-223/LTST-C191KRKT.PDF?src-supplier=Digi-Key, ComponentLink2Description=http://www1.futureelectronics.com/doc/LITE-ON/LTST-C191KRKT.pdf?src-supplier=Future+Electronics, ComponentLink2URL=http://www1.futureelectronics.com/doc/LITE-ON/LTST-C191KRKT.pdf?src-supplier=Future+Electronics, ComponentLink3Description=https://www.verical.com/server-webapp/html/getDatasheet?partID=141922&src-supplier=Verical, ComponentLink3URL=https://www.verical.com/server-webapp/html/getDatasheet?partID=141922&src-supplier=Verical, ComponentLink4Description=http://www.mouser.com/ds/2/239/LTST-C191KRKT-1140668.pdf?src-supplier=Mouser, ComponentLink4URL=http://www.mouser.com/ds/2/239/LTST-C191KRKT-1140668.pdf?src-supplier=Mouser, Depth=0.8mm, Dominant Wavelength=631nm, Height=0.55mm, Illumination Color=Red, Lead Free="Lead Free", Length=1.6mm, Lens Style=Clear,Diffused,Colorless,Rectangular, Lens Transparency=Clear, Luminous Intensity=54mcd, Mount="Surface Mount", Number of Elements=1, Number of LEDs=1, Number of Pins=2, Packaging="Tape and Reel", Power Rating=75mW, Pricing 1="1=0.26, 10=0.192, 100=0.0909, 500=0.0606, 1000=0.0475, 2500=0.0465 (USD)", Radiation Hardening=No, Stock 1=230321, Supplier 1=Digi-Key, Viewing Angle=130°, Voltage=2V, Wavelength=639nm, Width=0.8mm
D2 D5: library part "TVS DIODE ESDA7P120-1U1M 5.5V 11.5V 1610", "11.5V Clamp 120A (8/20µs) Ipp Tvs Diode Surface Mount 1610", Case/Package=0603, Case Code (Metric)=1610, Clamping Voltage=11.5V, Manufacturer=STMicroelectronics, Max Operating Temperature=150°C, Min Breakdown Voltage=6.4V, Min Operating Temperature=-55°C, Peak Pulse Current=120A, Peak Pulse Power=1.4kW, Power Line Protection=No, Reverse Standoff Voltage=5.5V, Supplier Part Number 1=497-17159-1-ND, Case Code (Imperial)=0603, ComponentLink1Description=http://www.st.com/content/ccc/resource/technical/document/datasheet/group3/5e/7c/5d/76/3f/de/45/35/DM00359316/files/DM00359316.pdf/jcr:content/translations/en.DM00359316.pdf?src-supplier=Digi-Key, ComponentLink1URL=http://www.st.com/content/ccc/resource/technical/document/datasheet/group3/5e/7c/5d/76/3f/de/45/35/DM00359316/files/DM00359316.pdf/jcr:content/translations/en.DM00359316.pdf?src-supplier=Digi-Key, ComponentLink2Description=http://www.farnell.com/datasheets/2815837.pdf?src-supplier=Newark, ComponentLink2URL=http://www.farnell.com/datasheets/2815837.pdf?src-supplier=Newark, ComponentLink3Description=http://www.farnell.com/datasheets/2815837.pdf?src-supplier=Farnell, ComponentLink3URL=http://www.farnell.com/datasheets/2815837.pdf?src-supplier=Farnell, ComponentLink4Description=http://www.farnell.com/datasheets/2815837.pdf?src-supplier=Element14, ComponentLink4URL=http://www.farnell.com/datasheets/2815837.pdf?src-supplier=Element14, Composition=Zener, Manufacturer Part Number=ESDA7P120-1U1M, Mount="Surface Mount", Number of Unidirectional Channels=1, Packaging="Cut Tape", Pricing 1="1=0.35, 10=0.287, 25=0.2624, 100=0.1647, 250=0.1629, 500=0.1525, 1000=0.1037, 2500=0.0994 (USD)", Stock 1=15775, Supplier 1=Digi-Key
  D5: ClassName=P109
D3: library part "DIODE SCHOTTKY 30V 70MA SOD923", "Diode Schottky 30V 70mA (DC) Surface Mount SOD-923", Average Rectified Current=70mA, Case/Package=SOD-923-2, Forward Voltage=350mV, Manufacturer="ON Semiconductor", Max Forward Surge Current (Ifsm)=500mA, Max Operating Temperature=125°C, Max Power Dissipation=100mW, Max Repetitive Reverse Voltage (Vrrm)=30V, Max Reverse Leakage Current=500nA, Min Operating Temperature=-55°C, Package Quantity=1, Supplier Part Number 1=NSR0140P2T5GOSCT-ND, ComponentLink1Description=http://www.onsemi.com/pub_link/Collateral/NSR0140P2-D.PDF?src-supplier=Future+Electronics, ComponentLink1URL=http://www.onsemi.com/pub_link/Collateral/NSR0140P2-D.PDF?src-supplier=Future+Electronics, ComponentLink2Description=http://www.farnell.com/datasheets/2353885.pdf?src-supplier=Newark, ComponentLink2URL=http://www.farnell.com/datasheets/2353885.pdf?src-supplier=Newark, ComponentLink3Description=http://www.farnell.com/datasheets/86281.pdf?src-supplier=Element14, ComponentLink3URL=http://www.farnell.com/datasheets/86281.pdf?src-supplier=Element14, ComponentLink4Description=http://www.onsemi.com/pub/Collateral/NSR0140P2-D.PDF?src-supplier=Avnet, ComponentLink4URL=http://www.onsemi.com/pub/Collateral/NSR0140P2-D.PDF?src-supplier=Avnet, ComponentLink5Description=http://www.onsemi.com/pub/Collateral/NSR0140P2-D.PDF?src-supplier=Digi-Key, ComponentLink5URL=http://www.onsemi.com/pub/Collateral/NSR0140P2-D.PDF?src-supplier=Digi-Key, ComponentLink6Description=http://www.mouser.com/ds/2/308/NSR0140P2-D-115172.pdf?src-supplier=Mouser, ComponentLink6URL=http://www.mouser.com/ds/2/308/NSR0140P2-D-115172.pdf?src-supplier=Mouser, Contact Plating=Tin,Matte, Element Configuration=Single, Forward Current=70mA, Height=0.43mm, Lead Free="Lead Free", Length=0.85mm, Manufacturer Part Number=NSR0140P2T5G, Max Reverse Voltage (DC)=30V, Max Surge Current=500mA, Mount="Surface Mount", Number of Pins=2, Packaging="Tape and Reel", Peak Non-Repetitive Surge Current=500mA, Peak Reverse Current=500nA, Power Dissipation=100mW, Pricing 1="1=0.36, 10=0.27, 25=0.2368, 100=0.1284, 500=0.1048, 1000=0.0777, 2500=0.0683 (USD)", Radiation Hardening=No, REACH SVHC="No SVHC", Stock 1=28802, Supplier 1=Digi-Key, Termination=SMD/SMT, Width=0.65mm
D4: library part "DIODE ZENER 5.1V 200MW SOD323F", "Zener Diode 5.1V 200mW ±5% Surface Mount SOD-323F", Manufacturer="ON Semiconductor / Fairchild", Max Operating Temperature=150°C, Max Power Dissipation=200mW, Max Reverse Leakage Current=1.8uA, Min Operating Temperature=-65°C, Package Quantity=1, Supplier Part Number 1=MM3Z5V1CCT-ND, Test Current=5mA, Tolerance=5%, Zener Voltage=5.1V, ComponentLink1Description=http://www.fairchildsemi.com/datasheets/MM/MM3Z10VC.pdf?src-supplier=Digi-Key, ComponentLink1URL=http://www.fairchildsemi.com/datasheets/MM/MM3Z10VC.pdf?src-supplier=Digi-Key, ComponentLink2Description=http://www.onsemi.com/pub/Collateral/MM3Z9V1C-D.pdf?src-supplier=Digi-Key, ComponentLink2URL=http://www.onsemi.com/pub/Collateral/MM3Z9V1C-D.pdf?src-supplier=Digi-Key, ComponentLink3Description=http://www.mouser.com/ds/2/149/MM3Z5V1C-195780.pdf?src-supplier=Mouser, ComponentLink3URL=http://www.mouser.com/ds/2/149/MM3Z5V1C-195780.pdf?src-supplier=Mouser, ComponentLink4Description=http://www.fairchildsemi.com/ds/MM/MM3Z9V1C.pdf?src-supplier=Avnet, ComponentLink4URL=http://www.fairchildsemi.com/ds/MM/MM3Z9V1C.pdf?src-supplier=Avnet, Element Configuration=Single, Height=1mm, Impedance=56R, Lead Free="Lead Free", Length=1.3mm, Manufacturer Part Number=MM3Z5V1C, Mount="Surface Mount", Number of Pins=2, Packaging="Tape and Reel", Power Dissipation=200mW, Pricing 1="1=0.2, 10=0.167, 25=0.1396, 100=0.0682, 500=0.0569, 1000=0.0395 (USD)", Radiation Hardening=No, REACH SVHC="No SVHC", Stock 1=27359, Supplier 1=Digi-Key, Voltage Tolerance=5%, Weight=0.0276g, Width=1.7mm
D6: library part "TVS DIODE ESDA25P35-1U1M 22V 41V 1610", "41V Clamp 35A (8/20µs) Ipp Tvs Diode Surface Mount 1610", Case/Package=1610, Clamping Voltage=41V, Manufacturer=STMicroelectronics, Max Operating Temperature=150°C, Min Breakdown Voltage=23.3V, Min Operating Temperature=-55°C, Peak Pulse Current=35A, Peak Pulse Power=1.4kW, Power Line Protection=No, Reverse Standoff Voltage=22V, Supplier Part Number 1=497-16913-1-ND, ComponentLink1Description=http://www.st.com/content/ccc/resource/technical/document/datasheet/group3/e4/43/53/b9/4e/8a/40/bb/DM00312034/files/DM00312034.pdf/jcr:content/translations/en.DM00312034.pdf?src-supplier=Digi-Key, ComponentLink1URL=http://www.st.com/content/ccc/resource/technical/document/datasheet/group3/e4/43/53/b9/4e/8a/40/bb/DM00312034/files/DM00312034.pdf/jcr:content/translations/en.DM00312034.pdf?src-supplier=Digi-Key, ComponentLink2Description=http://www.farnell.com/datasheets/2236209.pdf?src-supplier=Farnell, ComponentLink2URL=http://www.farnell.com/datasheets/2236209.pdf?src-supplier=Farnell, ComponentLink3Description=http://www.farnell.com/datasheets/2236209.pdf?src-supplier=Element14, ComponentLink3URL=http://www.farnell.com/datasheets/2236209.pdf?src-supplier=Element14, ComponentLink4Description=http://www.farnell.com/datasheets/2236209.pdf?src-supplier=Newark, ComponentLink4URL=http://www.farnell.com/datasheets/2236209.pdf?src-supplier=Newark, Composition=Zener, Manufacturer Part Number=ESDA25P35-1U1M, Mount="Surface Mount", Number of Pins=2, Number of Unidirectional Channels=1, Packaging="Tape and Reel", Pricing 1="1=0.45, 10=0.362, 25=0.3312, 100=0.2079, 250=0.2056, 500=0.1925, 1000=0.1309, 2500=0.1255 (USD)", Stock 1=12413, Supplier 1=Digi-Key
D7: library part "DIODE SCHOTTKY 40V 5A SOD128", "Diode Schottky 40V 5A Surface Mount CFP5", If - Forward Current="5 A", Ifsm - Forward Surge Current="70 A", Ir - Reverse Current="300 uA", Manufacturer=Nexperia, Maximum Operating Temperature="+ 150 C", Minimum Operating Temperature="- 55 C", Package / Case=SOD-128-2, Supplier Part Number 1=771-PMEG4050EP115, Vf - Forward Voltage="0.49 V", Vrrm - Repetitive Reverse Voltage="40 V", Brand=Nexperia, Category="Schottky Diodes & Rectifiers", ComponentLink1Description=https://www.mouser.com/datasheet/2/916/PMEG4050EP-1320387.pdf, ComponentLink1URL=https://www.mouser.com/datasheet/2/916/PMEG4050EP-1320387.pdf, Configuration=Single, Height="1.1 mm", Length="4 mm", Manufacturer Part Number=PMEG4050EP,115, Minimum Order Quantity=1, Mount="Surface Mount", Mounting Style=SMD/SMT, Operating Temperature Range="+ 150 C", Packaging="Cut Tape", Pricing 1="1=0.470, 10=0.346, 100=0.216, 1000=0.147, 3000=0.129, 9000=0.116, 24000=0.114, 45000=0.107, 99000=0.104 (USD)", Product="Schottky Diodes", Product Type="Schottky Diodes & Rectifiers", Qualification=AEC-Q101, Reeling=True, RoHS="RoHS Compliant", RoHS - Mouser=Y, Standard Pack Qty=3000, Stock 1=39277, Subcategory="Diodes & Rectifiers", Supplier 1=Mouser, Technology=Si, Type="Schottky Diode", Width="2.7 mm"
D8: library part "DIODE ZENER 6.2V 2.5W SOD123FL", Case/Package=SOD-123-2, Leakage Current=5uA, Manufacturer="ON Semiconductor", Manufacturer Part Number=1SMF5920BT1G, Max Operating Temperature=150°C, Max Power Dissipation=2.5W, Min Operating Temperature=-55°C, Package Quantity=3000, Supplier Part Number 1=1SMF5920BT1GOSCT-ND, Tolerance=5%, Working Voltage=4V, Zener Voltage=6.2V, ComponentLink1Description=http://www.mouser.com/ds/2/308/1SMF5920B-D-108688.pdf?src-supplier=Mouser, ComponentLink1URL=http://www.mouser.com/ds/2/308/1SMF5920B-D-108688.pdf?src-supplier=Mouser, ComponentLink2Description=http://components.arrow.com/part/dataview/50999384S92509N5236?src-supplier=Arrow, ComponentLink2URL=http://components.arrow.com/part/dataview/50999384S92509N5236?src-supplier=Arrow, ComponentLink3Description=http://www.onsemi.com/pub/Collateral/1SMF5920B-D.PDF?src-supplier=Digi-Key, ComponentLink3URL=http://www.onsemi.com/pub/Collateral/1SMF5920B-D.PDF?src-supplier=Digi-Key, ComponentLink4Description=http://www.onsemi.com/pub_link/Collateral/1SMF5920B-D.PDF?src-supplier=Avnet, ComponentLink4URL=http://www.onsemi.com/pub_link/Collateral/1SMF5920B-D.PDF?src-supplier=Avnet, Contact Plating=Tin,Matte, Depth=1.65mm, Direction=Unidirectional, Element Configuration=Single, Impedance=2R, Lead Free="Lead Free", Length=2.7mm, Max Reverse Leakage Current=5uA, Mount="Surface Mount", Number of Pins=2, Packaging="Tape and Reel", Power Dissipation=2.5W, Pricing 1="1=0.46, 10=0.391, 25=0.3652, 100=0.2712, 250=0.2576, 500=0.2117, 1000=0.1721 (USD)", Radiation Hardening=No, Stock 1=1919, Supplier 1=Digi-Key, Voltage Tolerance=5%
D9: library part "DIODE SCHOTTKY 20V 1A STMITEFLAT", "Diode Schottky 20V 1A Surface Mount STmite Flat", Average Rectified Current=1A, Forward Voltage=440mV, Manufacturer=STMicroelectronics, Max Operating Temperature=150°C, Max Repetitive Reverse Voltage (Vrrm)=20V, Max Reverse Leakage Current=300uA, Max Surge Current=50A, Min Operating Temperature=-65°C, Package Quantity=1, Peak Reverse Current=3.9uA, Supplier Part Number 1=497-12281-1-ND, ComponentLink1Description=http://www.st.com/web/en/resource/technical/document/datasheet/CD00198749.pdf?src-supplier=Future+Electronics, ComponentLink1URL=http://www.st.com/web/en/resource/technical/document/datasheet/CD00198749.pdf?src-supplier=Future+Electronics, ComponentLink2Description=http://www.st.com/content/ccc/resource/technical/document/datasheet/b2/7e/6d/c8/81/31/4e/f2/CD00198749.pdf/files/CD00198749.pdf/jcr:content/translations/en.CD00198749.pdf?src-supplier=Digi-Key, ComponentLink2URL=http://www.st.com/content/ccc/resource/technical/document/datasheet/b2/7e/6d/c8/81/31/4e/f2/CD00198749.pdf/files/CD00198749.pdf/jcr:content/translations/en.CD00198749.pdf?src-supplier=Digi-Key, ComponentLink3Description=http://www.st.com/st-web-ui/static/active/en/resource/technical/document/datasheet/CD00198749.pdf?src-supplier=Mouser, ComponentLink3URL=http://www.st.com/st-web-ui/static/active/en/resource/technical/document/datasheet/CD00198749.pdf?src-supplier=Mouser, Element Configuration=Single, Forward Current=1A, Lead Free="Lead Free", Manufacturer Part Number=STPS120MF, Max Reverse Voltage (DC)=20V, Mount="Surface Mount", Number of Pins=2, Packaging="Tape and Reel", Peak Non-Repetitive Surge Current=50A, Pricing 1="1=0.48, 10=0.409, 100=0.3057, 500=0.2402, 1000=0.1856, 2500=0.1692, 5000=0.1583 (USD)", Radiation Hardening=No, Stock 1=3984, Supplier 1=Digi-Key
D10: library part "DIODE ZENER 3.3V 500MW SOD123", "Zener Diode ±5% Surface Mount SOD-123", Case/Package=SOD-123-2, Forward Voltage=900mV, Manufacturer=Diodes, Max Operating Temperature=150°C, Max Power Dissipation=500mW, Max Reverse Current=25uA, Min Operating Temperature=-65°C, Package Quantity=3000, Supplier Part Number 1=MMSZ5226B-FDICT-ND, Test Current=20mA, Tolerance=5%, Voltage Rating (DC)=3.3V, ComponentLink1Description=http://www.diodes.com/datasheets/ds18010.pdf?src-supplier=Avnet+Europe, ComponentLink1URL=http://www.diodes.com/datasheets/ds18010.pdf?src-supplier=Avnet+Europe, Element Configuration=Single, Height=1.35mm, Impedance=28R, Lead Free="Lead Free", Length=3.85mm, Manufacturer Part Number=MMSZ5226B-7-F, Max Reverse Leakage Current=25uA, Mount="Surface Mount", Number of Pins=2, Packaging="Tape and Reel", Power Dissipation=500mW, Power Rating=500mW, Pricing 1="1=0.19, 10=0.164, 100=0.063, 500=0.046, 1000=0.0309 (USD)", Radiation Hardening=No, Stock 1=63613, Supplier 1=Digi-Key, Termination=SMD/SMT, Voltage Tolerance=5%, Weight=0.000353oz, Width=1.7mm, Working Voltage=3.3V, Zener Current=25uA, Zener Voltage=3.3V
D11 D12: library part "TVS DIODE 5V 12.5V 5CH SC88", "12.5V Clamp 8A (8/20µs) Ipp Tvs Diode Surface Mount SC-88/SC70-6/SOT-363", Breakdown Voltage=6.2V, Capacitance=130pF, Case/Package=SC, Clamping Voltage=12.5V, Leakage Current=5uA, Manufacturer="ON Semiconductor", Max Breakdown Voltage=7.2V, Max Operating Temperature=125°C, Max Output Current=8A, Max Power Dissipation=100W, Min Operating Temperature=-40°C, Package Quantity=1, Power Line Protection=No, Reverse Standoff Voltage=5V, Supplier Part Number 1=SMF05CT1GOSCT-ND, Test Current=1mA, ComponentLink1Description=http://www.farnell.com/datasheets/1708354.pdf?src-supplier=Element14, ComponentLink1URL=http://www.farnell.com/datasheets/1708354.pdf?src-supplier=Element14, ComponentLink2Description=http://www.onsemi.com/pub/Collateral/SMF05C-D.PDF?src-supplier=Digi-Key, ComponentLink2URL=http://www.onsemi.com/pub/Collateral/SMF05C-D.PDF?src-supplier=Digi-Key, ComponentLink3Description=http://www.mouser.com/ds/2/308/SMF05C-D-100912.pdf?src-supplier=Mouser, ComponentLink3URL=http://www.mouser.com/ds/2/308/SMF05C-D-100912.pdf?src-supplier=Mouser, ComponentLink4Description=http://www.onsemi.com/pub/Collateral/SMF05C-D.PDF?src-supplier=Avnet, ComponentLink4URL=http://www.onsemi.com/pub/Collateral/SMF05C-D.PDF?src-supplier=Avnet, ComponentLink5Description=https://www.verical.com/server-webapp/html/getDatasheet?partID=98371&src-supplier=Verical, ComponentLink5URL=https://www.verical.com/server-webapp/html/getDatasheet?partID=98371&src-supplier=Verical, Composition=Zener, Contact Plating=Tin,Matte, Depth=1.25mm, Direction=Unidirectional, Element Configuration="Common Anode", ESD Protection=Yes, Height=1mm, Lead Free="Lead Free", Length=2mm, Manufacturer Part Number=SMF05CT1G, Max Reverse Leakage Current=5uA, Max Surge Current=8A, Min Breakdown Voltage=6.2V, Mount="Surface Mount", Number of Channels=5, Number of Elements=5, Number of Pins=6, Number of Unidirectional Channels=5, Packaging="Tape and Reel", Peak Pulse Current=8A, Peak Pulse Power=100W, Polarity=Unidirectional, Power Dissipation=100W, Pricing 1="1=0.41, 10=0.307, 25=0.2768, 100=0.1459, 250=0.1444, 500=0.1293, 1000=0.1006 (USD)", Radiation Hardening=No, REACH SVHC="No SVHC", Reverse Breakdown Voltage=6.2V, Stock 1=33811, Supplier 1=Digi-Key, Termination=SMD/SMT, Voltage Rating (DC)=5V, Width=1.25mm, Working Voltage=5V
ESP32_MOD: library part "MOD ESP32-C3-MINI-1-H4, ESP32-C3FH4, PCB ANT", "Bluetooth, WiFi 802.11b/g/n, Bluetooth v5.0 Transceiver Module 2.412GHz ~ 2.484GHz PCB Trace Surface Mount", Manufacturer="Espressif Systems", Supplier Part Number 1=356-ESP32-C3-MINI1H4, Manufacturer Part Number=ESP32-C3-MINI-1-H4, Pricing 1="1=1.9, 10=1.9, 50=1.9, 100=1.9, 1000=1.9, 10000=1.9 (USD)", Stock 1=0, Supplier 1=Mouser
FB1: library part "FERRITE BEAD 30 OHM 0603 1LN", "30 Ohms @ 100MHz 1 Power Line Ferrite Bead 0603 (1608 Metric) 5A 10mOhm", Case/Package=0603, Case Code (Metric)=1608, Current Rating=5A, DC Resistance (DCR)=10mR, Manufacturer=TDK, Manufacturer Part Number=MPZ1608S300ATAH0, Max Operating Temperature=125°C, Min Operating Temperature=-55°C, Package Quantity=4000, Supplier Part Number 1=445-1562-6-ND, Test Frequency=100MHz, Tolerance=25%, Case Code (Imperial)=0603, ComponentLink1Description=https://media.digikey.com/pdf/Data%20Sheets/TDK%20PDFs/MPZ_Series_Br.pdf?src-supplier=Digi-Key, ComponentLink1URL=https://media.digikey.com/pdf/Data%20Sheets/TDK%20PDFs/MPZ_Series_Br.pdf?src-supplier=Digi-Key, ComponentLink2Description=http://www.farnell.com/datasheets/1795297.pdf?src-supplier=Element14, ComponentLink2URL=http://www.farnell.com/datasheets/1795297.pdf?src-supplier=Element14, Core Material=Ferrite, Depth=0.8mm, Height=0.6mm, Impedance=30R, Lead Free="Lead Free", Length=0.063inch, Max DC Current=5A, Mount="Surface Mount", Packaging="Tape and Reel", Pricing 1="1=0.1, 10=0.079, 25=0.0716, 50=0.0644, 100=0.0472, 250=0.0343, 500=0.0315, 1000=0.0272 (USD)", REACH SVHC="No SVHC", Revision="July-2002: Re-released for DXP Platform.", Stock 1=93167, Supplier 1=Digi-Key, Termination=SMD/SMT, Weight=7.1E-05oz, Width=0.031inch
FB2 FB3: library part "FERRITE BEAD 30 OHM 0603 1LN", "30 Ohms @ 100MHz 1 Power Line Ferrite Bead 0603 (1608 Metric) 5A 10mOhm", Case/Package=0603, Case Code (Metric)=1608, Current Rating=5A, DC Resistance (DCR)=10mR, Manufacturer=TDK, Max Operating Temperature=125°C, Min Operating Temperature=-55°C, Package Quantity=4000, Supplier Part Number 1=445-1562-6-ND, Test Frequency=100MHz, Tolerance=25%, Case Code (Imperial)=0603, ClassName=P109, ComponentLink1Description=https://media.digikey.com/pdf/Data%20Sheets/TDK%20PDFs/MPZ_Series_Br.pdf?src-supplier=Digi-Key, ComponentLink1URL=https://media.digikey.com/pdf/Data%20Sheets/TDK%20PDFs/MPZ_Series_Br.pdf?src-supplier=Digi-Key, ComponentLink2Description=http://www.farnell.com/datasheets/1795297.pdf?src-supplier=Element14, ComponentLink2URL=http://www.farnell.com/datasheets/1795297.pdf?src-supplier=Element14, Core Material=Ferrite, Depth=0.8mm, Height=0.6mm, Impedance=30R, Lead Free="Lead Free", Length=0.063inch, Manufacturer Part Number=MPZ1608S300ATAH0, Max DC Current=5A, Mount="Surface Mount", Packaging="Tape and Reel", Pricing 1="1=0.1, 10=0.079, 25=0.0716, 50=0.0644, 100=0.0472, 250=0.0343, 500=0.0315, 1000=0.0272 (USD)", REACH SVHC="No SVHC", Revision="July-2002: Re-released for DXP Platform.", Stock 1=93167, Supplier 1=Digi-Key, Termination=SMD/SMT, Weight=7.1E-05oz, Width=0.031inch